# Altium PCB PCB1.PcbDoc
Units mil, origin at the board's own origin, x right, y up, seen from the top; angles counter-clockwise.
Board outline 716 x 1326 mil, 2 copper layers (Top Layer, Bottom Layer), stack 60.4 mil thick; 21 components, 34 nets, 131 pads, 41 vias.
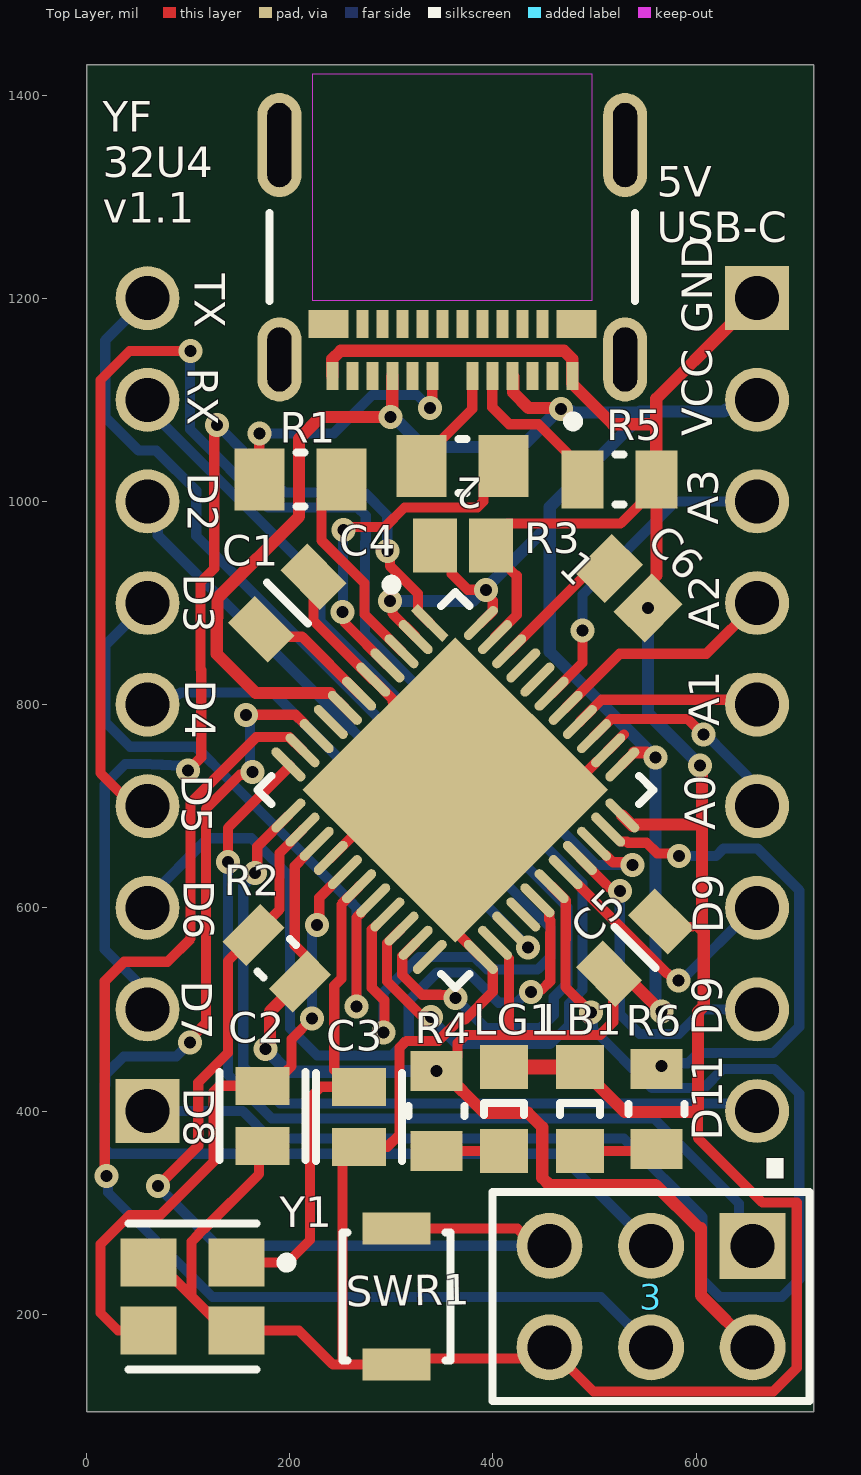
[diagram p0: Top Layer view]
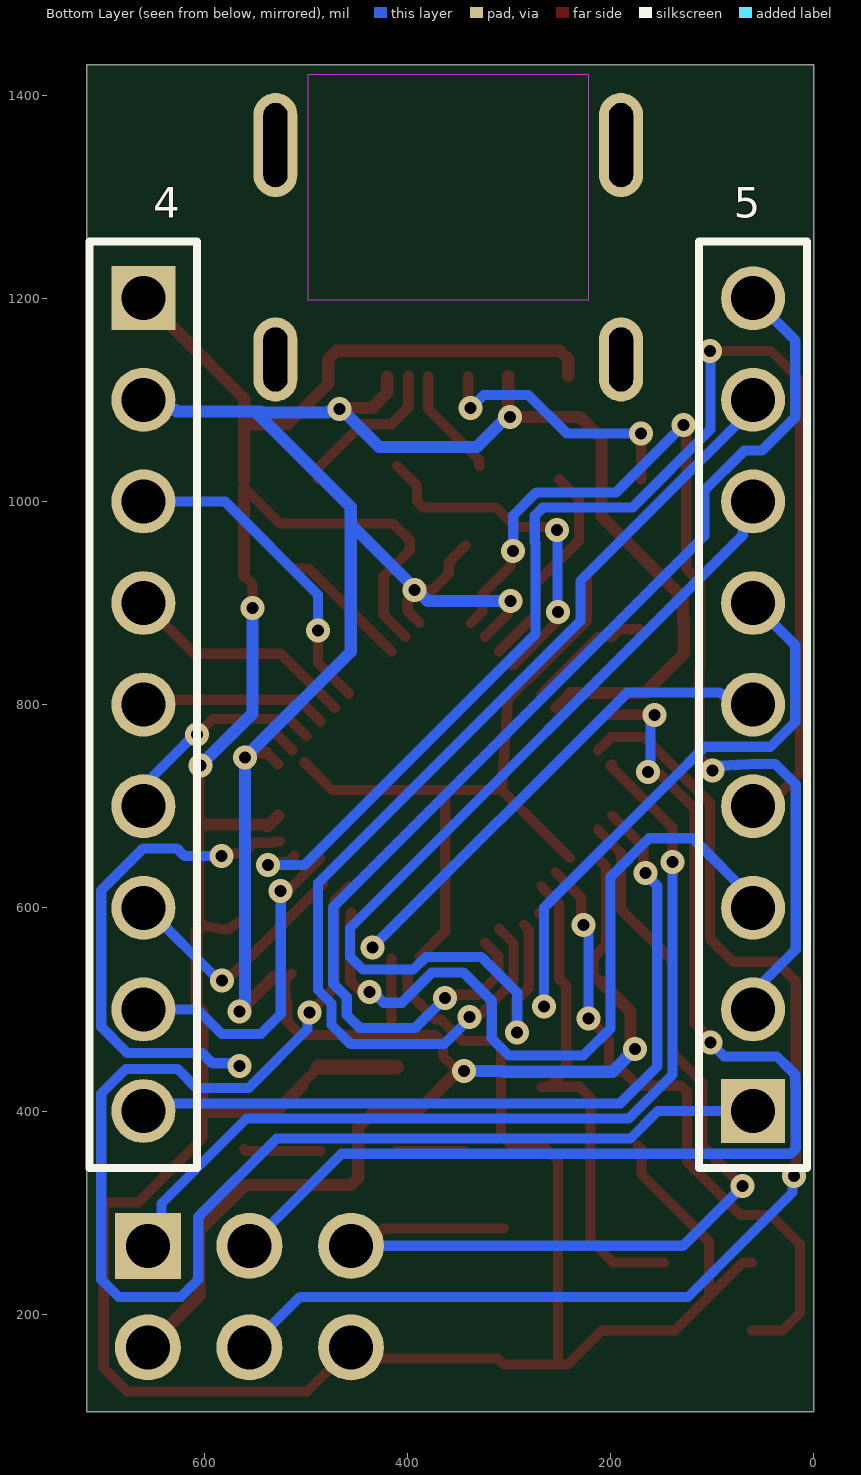
[diagram p1: Bottom Layer view, seen from below]
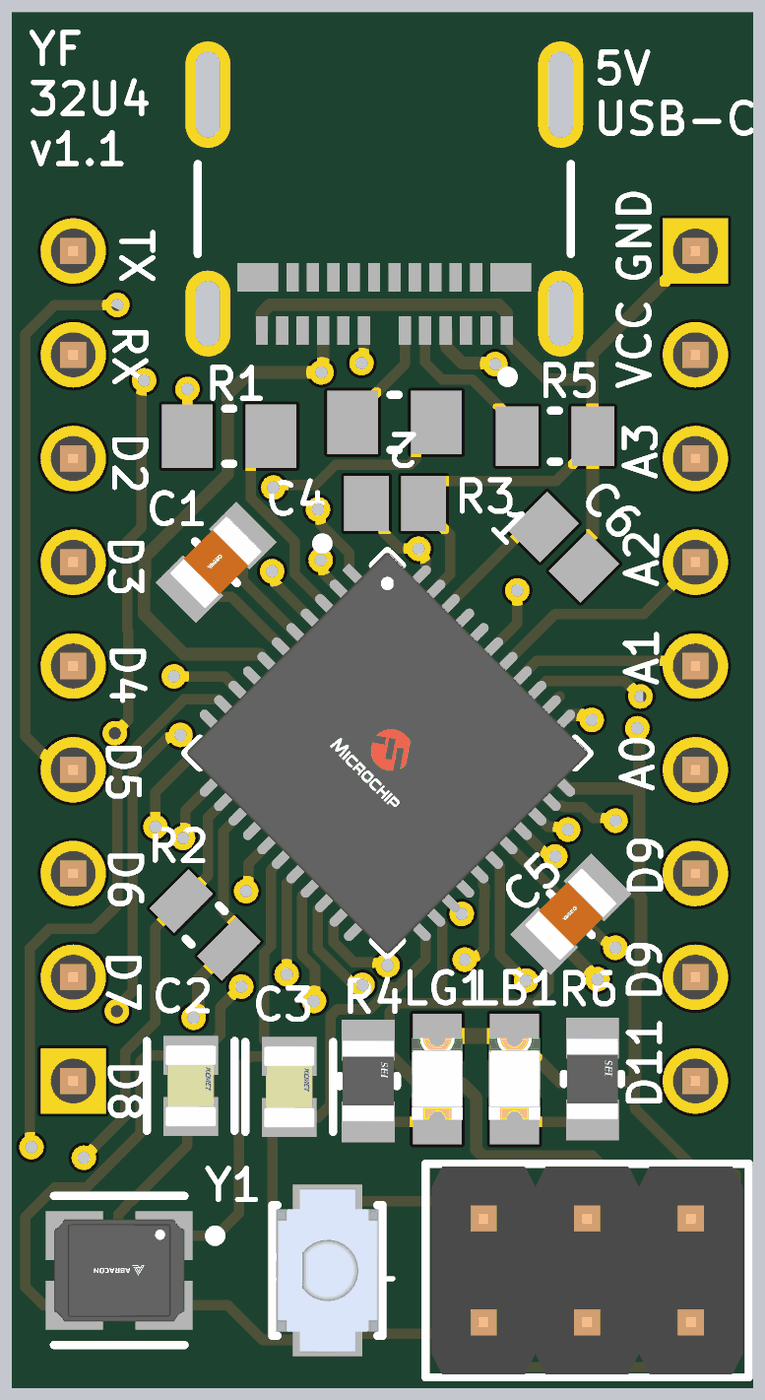
[diagram p2: 3D render of the assembled board from above, using the file's embedded part models]

## Layer stack, top to bottom
Top Solder: solder mask 0.5, Solder Resist, Dk 3.3
Top Layer: signal copper 0.7
Dielectric1: core 59, FR-4, Dk 4.3
Bottom Layer: signal copper 0.7
Bottom Solder: solder mask 0.5, Solder Resist, Dk 3.3

## Board outline
0,104 716,104 716,1430 0,1430

## Design rules (kind name [scope] priority, off if disabled: settings)
BoardOutlineClearance [All] p1: gap=7.87 ignorepadtopadclearanceinfootprint=FALSE
Clearance [All] p1: gap=5 ignorepadtopadclearanceinfootprint=FALSE
ComponentClearance [All] p1: gap=5 collisioncheckmode=3 verticalgap=5 showdistances=TRUE donotcheckwithout3dbody=TRUE
DiffPairsRouting [All] p1: maxlimit=10 minlimit=5 mostfreqgap=5 toplayer_minwidth=5 toplayer_maxwidth=1000 toplayer_prefwidth=5 bottomlayer_minwidth=5 bottomlayer_maxwidth=1000 bottomlayer_prefwidth=5 maxuncoupledlength=500
Height [All] p1: minheight=0 maxheight=71497.94 prefheight=500
HoleSize [All] p1: absolutevalues=TRUE maxlimit=248.03 minlimit=11.81 maxpercent=80.000 minpercent=20.000
HoleToHoleClearance [All] p1: gap=9.84 allowstackedmicrovias=FALSE
MinimumAnnularRing [All] p1: minimumring=3
MinimumSolderMaskSliver [All] p1: minsoldermaskwidth=0
PlaneClearance [All] p1: clearance=5
PlaneConnect PlaneConnectPowerPads [InPadClass('PowerPads')] p1: planeconnectstyle=Direct reliefexpansion=20 reliefentries=4 reliefconductorwidth=10 reliefairgap=10
PlaneConnect [All] p2: pad.planeconnectstyle=Relief pad.reliefexpansion=11.81 pad.reliefentries=4 pad.reliefconductorwidth=5 pad.reliefairgap=5 via.planeconnectstyle=Direct via.reliefexpansion=11.81 via.reliefentries=4 via.reliefconductorwidth=5 via.reliefairgap=5
PolygonConnect PolygonConnectPowerPads [All vs (InPadClass('PowerPads'))] p1: connectstyle=Direct reliefconductorwidth=10 reliefentries=4 polygonreliefangle="90 Angle" airgapwidth=10
PolygonConnect [All] p2: thpad.connectstyle=Relief thpad.reliefconductorwidth=5 thpad.reliefentries=4 thpad.polygonreliefangle="90 Angle" thpad.airgapwidth=5 smdpad.connectstyle=Relief smdpad.reliefconductorwidth=5 smdpad.reliefentries=4 smdpad.polygonreliefangle="90 Angle" smdpad.airgapwidth=5 via.connectstyle=Direct via.reliefconductorwidth=5 via.reliefentries=4 via.polygonreliefangle="90 Angle" via.airgapwidth=5
RoutingVias [All] p1: holewidth=11.81 width=23.62 viastyle="Through Hole" minholewidth=11.81 minwidth=23.62 maxholewidth=23.62 maxwidth=259.84
SilkToSilkClearance [All] p1: silktosilkclearance=0
SilkToSolderMaskClearance [IsPad] p1: minsilkscreentomaskgap=5 clearancetoexposedcopper=TRUE
SolderMaskExpansion [All] p1: expansion=2.95 istentingtop=FALSE
Width [All] p1: maxlimit=1000 minlimit=5 preferedwidth=10 minimp=50.000000 maximp=50.000000 favimp=50.000000
20 further rules are at their usual default settings.

## Classes and differential pairs
component class Sheet1: C1 C2 C4 C5 C6 LB1 LG1 R2 R3 R4 R6 SWR1 Y1

## Components (designator, comment, footprint, x,y, rotation, side; value= is the part's Value field where it differs from the comment)
1 "ATMEGA32U4RC-MUR" FP-44PW-IPC_A 363,716 r315 top (schematic designator 32U4)
2 "1054500101" FP-1054500101-MFG 360,1272 r180 top (schematic designator USB-C?)
3 "61300621121" 61300621121 555.67,217.38 r180 top (schematic designator ICSP)
4 "61300911121" 61300911121 660,800 r270 bottom (schematic designator PR)
5 "61300911121" 61300911121 60,800 r90 bottom (schematic designator PL)
C1 "1uF" FP-CC0805-EB-MFG 197.65,900 r45 top (schematic designator C2)
C2 "18pF" FP-C0805C-DN-MFG 173.29,395.28 r270 top value="18 pF" (schematic designator C5)
C3 "18pF" FP-C0805C-DN-MFG 268.26,394.31 r270 top value="18 pF" (schematic designator C4)
C4 ".1uF" CAPC2013X145X50LL20T25 370.35,956.75 r0 top (schematic designator C1)
C5 "1uF" FP-CC0805-EB-MFG 539.92,560.8 r45 top (schematic designator C0)
C6 ".1uF" CAPC2013X145X50LL20T25 533.19,914.61 r315 top (schematic designator C3)
LB1 "GREEN" 0805_A 485.58,401.98 r270 top (schematic designator LDG)
LG1 "GREEN" 0805_A 411.14,401.98 r270 top (schematic designator LDG)
R1 "22Ohm" RESC2013X60X30ML20T20 210.41,1021.53 r0 top (schematic designator R2)
R2 "10K" RESC2013X60X30LL20T20 187.21,550.36 r135 top (schematic designator R3)
R3 "22Ohm" RESC2013X60X30ML20T20 369.84,1034.86 r0 top (schematic designator R1)
R4 "1K" FP-RNCP0805-MFG 344.58,400 r270 top
R5 "5.1k" RESC2013X60X30NL20T20 524.61,1021.53 r0 top (schematic designator R0)
R6 "1K" FP-RNCP0805-MFG 560.75,401.98 r270 top (schematic designator R5)
SWR1 "" FP-B3U-1000P-MFG 305.11,217.38 r90 top (schematic designator SWR)
Y1 "ABM8G-16.000MHZ-18-D2Y-T" FP-ABM8G-MFG 104.31,217.38 r180 top (schematic designator Y?)

## Footprints (in the part's own frame and the unit in brackets; to place one, negate y for a bottom-side part, rotate by r counter-clockwise, add the part's x,y. Pads: shape width x height; smd on the part's side, far side on the other; paste and mask are expansions set on the pad)
0805_A [mm] "Chip LED, 2-Leads, Body 2.0x1.3mm, IPC Medium Density"
  rect 1.1x1.2 smd: 1(-1.05,0) 2(1.05,0)
  silkscreen extent -0.15,-0.5 0.15,0.5, body extent -1,-0.62 1,0.63, height 0.68
61300621121 [mm] "Pin Header, pitch 2.54 mm, THT, Vertical, dual row, 6p"
  rect 1.65x1.65 hole 1.1: 1(-2.54,-1.27)
  round 1.65 hole 1.1: 2(-2.54,1.27) 3(0,-1.27) 4(0,1.27) 5(2.54,-1.27) 6(2.54,1.27)
  silkscreen extent -3.96,-2.62 3.96,2.61, body extent -3.81,-2.54 3.81,2.54, height 8.59
61300911121 [mm] "Pin Header, pitch 2.54 mm, THT, Vertical, single row, 9p"
  rect 1.6x1.6 hole 1.1: 1(-10.16,0)
  round 1.6 hole 1.1: 2(-7.62,0) 3(-5.08,0) 4(-2.54,0) 5(0,0) 6(2.54,0) 7(5.08,0) 8(7.62,0) 9(10.16,0)
  silkscreen extent -11.58,-1.34 11.58,1.35, body extent -11.43,-1.27 11.43,1.27, height 8.57
CAPC2013X145X50LL20T25 [mm] "Chip Capacitor, 2-Leads, Body 2.00x1.25mm, IPC High Density"
  rect 1.1x1.35 smd: 1(-0.7,0) 2(0.7,0)
  body extent -1.1,-0.72 1.1,0.73, height 1.45
FP-44PW-IPC_A [mm]
  rect 1.106x0.239 smd paste+0 mask+0: 1(-3.403,2.5)
  rrect100% 1.106x0.239 smd paste+0 mask+0: 2(-3.403,2) 3(-3.403,1.5) 4(-3.403,1) 5(-3.403,0.5) 6(-3.403,0) 7(-3.403,-0.5) 8(-3.403,-1) 9(-3.403,-1.5) 10(-3.403,-2) 11(-3.403,-2.5) 23(3.403,-2.5) 24(3.403,-2) 25(3.403,-1.5) 26(3.403,-1) 27(3.403,-0.5) 28(3.403,0) 29(3.403,0.5) 30(3.403,1) 31(3.403,1.5) 32(3.403,2) 33(3.403,2.5)
  rrect100% 0.239x1.106 smd paste+0 mask+0: 12(-2.5,-3.403) 13(-2,-3.403) 14(-1.5,-3.403) 15(-1,-3.403) 16(-0.5,-3.403) 17(0,-3.403) 18(0.5,-3.403) 19(1,-3.403) 20(1.5,-3.403) 21(2,-3.403) 22(2.5,-3.403) 34(2.5,3.403) 35(2,3.403) 36(1.5,3.403) 37(1,3.403) 38(0.5,3.403) 39(0,3.403) 40(-0.5,3.403) 41(-1,3.403) 42(-1.5,3.403) 43(-2,3.403) 44(-2.5,3.403)
  rect 5.4x5.4 smd paste-1000 mask+0: 45(0,0)
  silkscreen extent -4.88,-3.5 3.5,3.5, body extent -4.46,-4.46 4.46,4.46, height 0.25
FP-1054500101-MFG [mm]
  rrect100% 1.1x2.1 hole 1.6 slot 0.6 at 0 deg paste-1000 mask+0: 1(-4.32,3.36) 2(4.32,3.36)
  rrect100% 1.1x2.6 hole 2.1 slot 0.6 at 0 deg paste-1000 mask+0: 3(-4.32,-2) 4(4.32,-2)
  rect 0.3x0.7 smd paste+0 mask+0: A1(-3,3.77) A2(-2.5,3.77) A3(-2,3.77) A4(-1.5,3.77) A5(-1,3.77) A6(-0.5,3.77) A7(0.5,3.77) A8(1,3.77) A9(1.5,3.77) A10(2,3.77) A11(2.5,3.77) A12(3,3.77) B2(2.25,2.47) B3(1.75,2.47) B4(1.25,2.47) B5(0.75,2.47) B6(0.25,2.47) B7(-0.25,2.47) B8(-0.75,2.47) B9(-1.25,2.47) B10(-1.75,2.47) B11(-2.25,2.47)
  rect 1x0.7 smd paste+0 mask+0: B1(3.1,2.47) B12(-3.1,2.47)
  Keep-Out Layer region: -3.5,-3.77 3.5,-3.77 3.5,1.88 -3.5,1.88
  silkscreen extent -4.57,-0.3 4.57,5.03
FP-ABM8G-MFG [mm]
  rect 1.4x1.2 smd paste+0 mask+0: 1(-1.1,-0.85) 2(1.1,-0.85) 3(1.1,0.85) 4(-1.1,0.85)
  silkscreen extent -2.48,-1.83 1.6,1.82, body extent -1.9,-1.55 1.9,1.55, height 0.25
FP-B3U-1000P-MFG [mm]
  rect 0.8x1.7 smd paste+0 mask+0: 1(-1.7,0) 2(1.7,0)
  silkscreen extent -1.6,-1.35 1.6,1.35, body extent -2.2,-1.45 2.2,1.45, height 0.25
FP-C0805C-DN-MFG [mm]
  rect 0.95x1.35 smd paste+0 mask+0: 1(-0.75,0) 2(0.75,0)
  silkscreen extent -1.1,-1.07 1.1,1.07, body extent -1.4,-0.85 1.4,0.85, height 0.25
FP-CC0805-EB-MFG [mm]
  rect 0.95x1.4 smd paste+0 mask+0: 1(-0.925,0) 2(0.925,0)
  silkscreen extent 0,-0.72 0,0.72, body extent -1.72,-1.17 1.72,1.17, height 0.25
FP-RNCP0805-MFG [mm]
  rect 1x1.3 smd paste+0 mask+0: 1(-1,0) 2(1,0)
  silkscreen extent -0.13,-0.7 0.12,0.7, body extent -1.6,-0.8 1.6,0.8, height 0.25
RESC2013X60X30LL20T20 [mm] "Chip Resistor, 2-Leads, Body 2.00x1.25mm, IPC High Density"
  rect 0.85x1.35 smd: 1(-0.825,0) 2(0.825,0)
  silkscreen extent -0.1,-0.58 0.1,0.57, body extent -1.1,-0.73 1.1,0.73, height 0.6
RESC2013X60X30ML20T20 [mm] "Chip Resistor, 2-Leads, Body 2.00x1.25mm, IPC Low Density"
  rect 1.25x1.55 smd: 1(-1.025,0) 2(1.025,0)
  silkscreen extent -0.1,-0.68 0.1,0.68, body extent -1.1,-0.72 1.1,0.72, height 0.6
RESC2013X60X30NL20T20 [mm] "Chip Resistor, 2-Leads, Body 2.00x1.25mm, IPC Medium Density"
  rect 1.05x1.45 smd: 1(-0.925,0) 2(0.925,0)
  silkscreen extent -0.1,-0.62 0.1,0.63, body extent -1.1,-0.72 1.1,0.72, height 0.6

## Part data
1: library part CMP-06276-000241-1, "IC MCU 8BIT 32KB FLASH 44VQFN", Case/Package=VQFN, Frequency=16MHz, Max Operating Temperature=85°C, Min Operating Temperature=-40°C, Core Architecture=AVR, Interface=I2C, Memory Size=32KB, Memory Type=FLASH, Number of I/Os=26, Oscillator Type=Internal, Packaging="Tape and Reel", Peripherals="Brown-out Detect/Reset", RoHS Compliant=Yes
2: library part CMP-04767-000004-1, "CONN RCP USB3.1 TYPEC 24P SMD RA", Current Rating=0.25/1.25/5A, Manufacturer=Molex, Package=0, Temperature="-30°C to +85°C", Temperature Range High=+85°C, Temperature Range Low=-30°C, Voltage Rating=30V, Automotive=No, Category=Conn, ComponentLink2Description=Datasheet, ComponentLink2URL=https://www.molex.com/webdocs/datasheets/pdf/en-us/1054500101_IO_CONNECTORS.pdf, Conn Orientation="Right Angle", Contact Material=Gold,Nickel, Device Class L1=Connectors, Device Class L2="USB Connectors", Device Class L3=unset, Digikey Description="CONN RCP USB3.1 TYPEC 24P SMD RA", Footprint Url=https://www.molex.com/pdm_docs/sd/1054500101_sd.pdf, Height=3.44mm, Is Female=yes, Lead Free=Yes, Manufacturer Part Number=1054500101, Mouser Description="USB Shielded I/O Receptacle; Type C; Right Angle; Surface Mount; Gold over Nickel", Number Of Contacts=24, Octopart=https://octopart.com/105450-0101-molex-68082325, Pitch=0.5mm, RoHS=TRUE, Shielding=true, Usb Standard="USB 3.1"
3: library part CMP-1502-01072-1, "THT Vertical Pin Header WR-PHD, Pitch 2.54 mm, Dual Row, 6 pins", Contact Resistance=20mOhm, Manufacturer="Wurth Elektronik", Operating Temperature=-40to105degC, Rated Current=3A, Withstanding Voltage=500VAC, Working Voltage=250VAC, Datasheet URL=https://katalog.we-online.de/em/datasheet/6130xx21121.pdf, Gender=Male, Manufacturer URL=http://www.we-online.de, Mounting Technology=THT, Orientation=Vertical, Package Reference=61300621121, Packaging=Bag, Part Number=61300621121, Pin Number=6, Pitch=2.54mm, Publisher=WurthElektronik, Row Number=Dual
4 5: library part CMP-1502-01080-1, "THT Vertical Pin Header WR-PHD, Pitch 2.54 mm, Single Row, 9 pins", Contact Resistance=20mOhm, Manufacturer="Wurth Elektronik", Operating Temperature=-40to105degC, Rated Current=3A, Withstanding Voltage=500VAC, Working Voltage=250VAC, Datasheet URL=https://katalog.we-online.de/em/datasheet/6130xx11121.pdf, Gender=Male, Manufacturer URL=http://www.we-online.de, Mounting Technology=THT, Orientation=Vertical, Package Reference=61300911121, Packaging=Bag, Part Number=61300911121, Pin Number=9, Pitch=2.54mm, Publisher=WurthElektronik, Row Number=Single
C1 C5: library part CMP-03422-000665-2, "CAP CER 1UF 6.3V X7R 0805 - CC0805KKX7R5BB105", Case Code (Imperial)=0805, Case Code (Metric)=2012, Dielectric=X7R, Max Operating Temperature=125°C, Min Operating Temperature=-55°C, Resistor Type=Ceramic, Tolerance=10%, Voltage Rating=6.3V, Capacitance=1uF, Case/Package=0805, Construction=Flat, Depth=1.25mm, Halogen Free="Halogen Free", Height=1.25mm, Lead Free="Lead Free", Length=2mm, Mount="Surface Mount", Packaging="Tape and Reel", Radiation Hardening=No, RoHS Compliant=Yes, Series=CC, Termination=SMD/SMT, Thickness=0.057inch, Voltage Rating (DC)=6.3V, Weight=0.000194oz, Width=0.049inch
C2 C3: library part CMP-1036-01146-3, "CAP CER 18PF 50V 10% NP0 0805 - C0805C180K5GACTU", Capacitance="18 pF", Manufacturer=KEMET, Manufacturer Part Number=C0805C180K5GACTU, Package=C0805C-DN, Temperature="-55°C to +125°C", Temperature Characteristic=C0G, Temperature Coefficient=30ppm/°C, Temperature Range High=+125°C, Temperature Range Low=-55°C, Tolerance=0.1, Voltage Rating="50 V", Automotive=No, Category=Cap, ComponentLink2Description=Datasheet, ComponentLink2URL=https://content.kemet.com/datasheets/KEM_C1003_C0G_SMD.pdf, Device Class L1="Passive Components", Device Class L2=Capacitors, Device Class L3="Ceramic Capacitors", Digikey Description="CAP CER 18PF 50V 10% NP0 0805", Height=0.88mm, Ipc Land Pattern Name=CAPC200125X78, Lead Free=Yes, Material=Ceramic, Mouser Description="Multilayer Ceramic Capacitors MLCC - SMD/SMT 50volts 18pF C0G 10%", Octopart=https://octopart.com/c0805c180k5gactu-kemet-6728804, RoHS=TRUE
C4 C6: library part CMP-1036-04391-2, "C0805C104K9RACTU", Manufacturer=Kemet, Part Number=C0805C104K9RACTU
LB1 LG1: library part CMP-1426-00007-1, "SMD mono-color Chip LED, WL-SMCW, Green - 150080GS75000", Color=Green, Manufacturer="Wuerth Elektronik", PartNumber=150080GS75000, ComponentLink1Description="Manufacturer URL", ComponentLink1URL=http://www.we-online.com, ComponentLink2Description=Datasheet, ComponentLink2URL=http://katalog.we-online.com/led/datasheet/150080GS75000.pdf, PackageReference=0805_A
R1 R3: library part CMP-2001-04578-1, "RK73B2ATTD220J", Manufacturer="KOA Speer", Part Number=RK73B2ATTD220J
R2: library part CMP-2001-01993-1, "RK73H2ATTD1002F", Manufacturer="KOA Speer", Part Number=RK73H2ATTD1002F
R4 R6: library part CMP-26527-001902-1, "1kΩ ±1% 0.25W 0805 High Power Anti-Sulfur Thin Film Chip Resistor - RNCP0805FTD1K00", Case Code (Imperial)=0805, Case Code (Metric)=2012, Max Operating Temperature=155°C, Max Power Dissipation=250mW, Min Operating Temperature=-55°C, Resistance=1kR, Resistor Type="Thin Film", Temperature Coefficient=100ppm/°C, Tolerance=1%, Case/Package=0805, Features="Moisture Resistant", Height=0.024inch, Lead Free="Lead Free", Length=0.079inch, Mount="Surface Mount", Number of Terminations=2, Packaging="Tape and Reel", Power Rating=250mW, RoHS Compliant=Yes, Series=RNCP, Size Code=0805, Width=0.049inch
R5: library part CMP-2001-01842-1, "RK73B2ATTD512J", Manufacturer="KOA Speer", Part Number=RK73B2ATTD512J
SWR1: library part CMP-2100-03586-2, "SWITCH TACTILE SPST-NO 0.05A 12V - B3U-1000P", Contact Current Rating=50mA, Contact Resistance=100mR, Insulation Resistance=100MR, Max Operating Temperature=70°C, Max Voltage Rating (DC)=12V, Min Operating Temperature=-25°C, Operating Force=1.5N, Package Quantity=1, Ratings="Dust Proof", Actuator Length=0.4mm, Actuator Type=Standard, Contact Material=Silver, Current Rating=50mA, Depth=2.5mm, Electrical Life=200000Cycles, Height=1.2mm, Illumination Type=Non-Illuminated, Lead Free="Lead Free", Length=4mm, Max Current Rating=50mA, Mechanical Life=200000Cycles, Mount="Surface Mount", Orientation=Straight, Packaging="Tape and Reel", Switch Function=Off-Mom, Switch Travel=0.15mm, Termination=SMD/SMT, Throw Configuration=SPST, Voltage Rating (DC)=12V, Weight=0.000776oz, Width=3mm
Y1: library part CMP-27762-006537-2, "Crystal 16MHz ±20ppm (Tol) ±30ppm (Stability) 18pF FUND 80Ω 4-Pin SMD T/R", Case/Package=CSMD, ESR (Equivalent Series Resistance)=80R, Frequency=16MHz, Frequency Stability=30ppm, Frequency Tolerance=20ppm, Load Capacitance=18pF, Max Operating Temperature=85°C, Min Operating Temperature=-40°C, Operating Frequency="16 MHz", Package Quantity=1000, Depth=2.5mm, Height=1mm, Lead Free="Lead Free", Length=3.2mm, Mount="Surface Mount", Number of Pins=4, Packaging="Tape and Reel", Radiation Hardening=No, Series=ABM8G, Series Resistance=80R, Termination=SMD/SMT, Tolerance=20ppm, Width=2.5mm

## Via types
v1: diameter 23.62, hole 11.81, Top Layer to Bottom Layer, 41 vias

## Nets (pads, with @x,y where several pads share a name; then routed paths per layer and width w, separated by ;. In a path a pad name is that pad's centre, name@x,y a point inside that pad or via, vN(x,y) a via of type N, cw(c..) or ccw(c..) an arc to the next point about the centre after c; other vN are vias at no path point)
A0: 1.36 4.6 | length 214.6
  Top Layer w10: 1.36 516.21,785.69 592.05,785.69 v1(607.05,770.69)
  Bottom Layer w10: v1(607.05,770.69) 609.32,770.69 630.68,749.33 649.86,730.15 649.86,710.14 4.6
A1: 1.37 4.5 | length 185.9
  Top Layer w10: 1.37 485.58,783.31 497.64,795.37 497.64,795.65 506.8,804.81 655.19,804.81 4.5
A2: 1.38 4.4 | length 231.1
  Top Layer w10: 1.38 524.84,850 610,850 4.4
A3: 1.39 4.3 | length 319.9
  Top Layer w10: 1.39 488.19,841.19 v1(488.19,872.85)
  Bottom Layer w10: v1(488.19,872.85) 488.19,908.19 580,1000 4.3
AREF: 1.42 C6.1 | length 131.5
  Top Layer w10: 1.42 497.57,934.09 C6.1
D2: 1.19 5.7 | length 954.3
  Top Layer w10: 1.19@285.43,583 280.8,578.37 280.8,521.37 293.19,508.98 293.19,478.23 v1(292.13,477.17)
  Bottom Layer w10: 5.7 70.14,989.86 70.14,966.54 456.6,580.08 456.6,551.8 444,539.2 394.3,539.2 382.06,551.44 327.09,551.44 292.13,516.48 v1(292.13,477.17)
D3: 1.18 5.6 | length 649
  Top Layer w10: v1(265.8,502.86) 265.8,590.55 1.18@270.53,595.28
  Bottom Layer w10: 5.6 18.5,858.5 18.5,782.81 41.31,760 42.81,758.5 107.65,758.5 141.76,724.39 259.98,605.83 265.8,600.01 v1(265.8,502.86)
D4: 1.25 5.5 | length 483.4
  Bottom Layer w10: 5.5 70.14,810.14 90.68,810.14 92.36,811.81 183.88,811.81 v1(434.65,561.01)
D5: 1.31 5.4 | length 1336
  Top Layer w10: 5.4 46.28,700 13.68,732.59 13.68,1119.45 42.23,1148 v1(102.44,1148) ; 1.31@511.56,651.37 518.05,644.88 534.58,644.88 v1(537.19,642.27)
  Bottom Layer w10: v1(102.44,1148) 102,1147.56 102,1070.79 178.92,993.87 267.05,993.87 274.78,986.14 274.78,960.62 274.19,960.03 274.19,869.37 501.28,642.27 v1(537.19,642.27)
D6: 1.27 5.3 | length 751.1
  Top Layer w10: v1(437.58,517) 440.18,519.61 448.32,519.61 456.46,527.75 456.46,575.05 456.67,575.27 456.67,587.45 455.47,588.65 1.27@455.47,595.28
  Bottom Layer w10: 5.3 60,609.04 119.42,668.46 162.44,668.46 200.19,630.71 200.19,481.42 227.01,454.59 300.4,454.59 317.14,471.33 317.14,508.45 345.13,536.44 375.85,536.44 405.77,506.52 423.42,506.52 433.89,517 v1(437.58,517)
D7: 1.1 5.2 | length 1015.5
  Top Layer w10: v1(100.06,735.25) 112.95,748.15 112.95,833.88 112.19,834.65 112.19,920.38 125.76,933.96 125.76,1072.72 v1(128.34,1075.29) ; v1(296,951) 298.61,948.39 298.61,936.68 326.21,909.08 326.21,891.99 1.1
  Bottom Layer w10: 5.2 60,517 20.93,556.07 18,559 18,721.41 35.16,738.57 38.09,741.5 60,741.5 cw(c60,700) 65.04,741.19 74.15,740.74 92.38,739.85 100.26,739.46 101.5,739.4 101.5,736.69 v1(100.06,735.25) ; v1(128.34,1075.29) 160.28,1043.35 194.76,1008.87 273.26,1008.87 296,986.13 v1(296,951)
D8: 1.28 5.1 | length 1346.3
  Top Layer w10: 1.28 471.67,607.33 471.67,569.05 471.46,568.84 471.46,521.96 v1(496.64,496.78)
  Bottom Layer w10: 5.1 153.63,400 180.63,373 528.83,373 606,295.83 606,234.1 623.1,217 684.39,217 701.5,234.1 701.5,417.19 677.19,441.5 626.39,441.5 607.44,422.55 556.64,422.55 498.48,480.71 498.48,494.94 v1(496.64,496.78)
D9: 1.29 4.7 | length 245.4
  Top Layer w10: 1.29@483.52,623.32 571.64,535.2 572.38,535.2 579.12,528.45 v1(582.81,528.45)
  Bottom Layer w10: v1(582.81,528.45) 585.63,528.45 657.18,600 4.7
D10: 1.30 4.8 | length 327.2
  Top Layer w10: 1.30 515.63,619.05 522.26,619.05 v1(524.87,616.44)
  Bottom Layer w10: v1(524.87,616.44) 524.87,495.42 544.55,475.74 582.97,475.74 607.24,500 4.8
D11: 1.12 4.9 | length 789.3
  Top Layer w10: v1(165.82,634.23) 168,636.41 168,660.2 1.12
  Bottom Layer w10: v1(165.82,634.23) 165.82,633.13 154.25,621.56 154.25,443.84 190.54,407.55 652.45,407.55 4.9
D13: 1.32 R6.1 | length 488.3
  Top Layer w10: 1.32@525.48,665.29 531.7,665.29 532.9,664.09 551.19,664.09 561.71,653.56 580.39,653.56 v1(583,650.96)
  Bottom Layer w10: v1(565.67,444.36) 568.28,446.97 592.13,446.97 602.16,457 675.68,457 701.5,482.81 701.5,617.19 660.18,658.5 627.21,658.5 619.66,650.96 v1(583,650.96)
D+: 1.4 R3.2 | length 344.6
  Top Layer w10: v1(251.78,891.38) 254.38,888.77 254.38,880.29 1.4 ; v1(252.97,972.06) 255.57,974.66 293.64,974.66 312.98,994 384.74,994 390.59,999.86 390.59,1015.25 R3.2
  Bottom Layer w10: v1(251.78,891.38) 252.37,891.98 252.37,971.46 v1(252.97,972.06)
D-: 1.3 R1.2 | length 209.8
  Top Layer w10: R1.2 231.16,1001.93 231.16,961.83 273.59,919.4 273.59,888.93 1.3
GND: 1.5 1.15 1.23 1.33 1.35 1.43 1.45 2.A1 2.A12 3.6 4.1 C1.2 C2.2 C3.2 C4.2 C5.2 C6.2 LB1.1 LG1.1 R5.2 SWR1.1 Y1.2 Y1.4 | length 4324.5
  Top Layer w10: Y1.2 70,250.84 103.46,217.38 ; C2.2 169.83,362.29 169.83,337.91 116.39,284.46 115.91,284.46 110.06,278.61 110.06,278.13 103.46,271.54 103.46,217.38 ; C1.2 223.4,882.47 281.22,824.66 1.5 301,805.84 1.45@307.32,716 ; 1.15 1.45@307.32,716 ; 1.23 363,576.81 1.45 ; 1.23@399.8,539.6 399.8,517.24 372.53,489.97 367.12,489.97 346.2,469.05 314.85,469.05 308,462.21 308,376.78 296,364.78 C3.2 265.67,364.78 251.97,351.08 251.97,150.45 ; 1.43 402.06,866.82 423.42,888.18 423.42,927.02 422.72,927.02 397.91,951.83 C4.2 397.91,961.67 414.57,978.32 525.69,978.32 561.03,1013.66 R5.2 ; LB1.1@487.54,443.32 504.2,426.66 LB1.1@504.2,424.7 ; 1.35@501.55,743.2 474.35,716 1.45 ; 1.35 529.05,770.69 ; v1(552.68,895.12) 552.68,918.67 561.03,927.02 ; 560.8,1088.38 561.03,1088.61 ; C5.2 573.87,580.72 576.47,578.86 580.5,578.86 588.36,580.19 588.94,580.28 601.76,582.44 604,582.82 605.81,584.63 ; 601.76,399.15 601.76,373.45 665.21,310 699,310 699,147 676,124 499.05,124 3.6 440.8,167.38 429.77,156.35 311.02,156.35 SWR1.1 251.97,150.45 ; 602.49,682.01 605.81,678.69 ; v1(604,740) v1@605.81,738.19 ; 103.46,217.38 136.93,183.91 Y1.4 209,183.91 242.46,150.45 251.97,150.45 ; 1.45@307.32,716 1.45
  Top Layer w12: 2.A12 241.89,1140.11 250.14,1148.36 469.86,1148.36 478.11,1140.11 2.A1 478.11,1115.77 517.88,1076 560.8,1076 ; LB1.1@504.2,424.7 529.75,399.15 601.76,399.15 601.76,497.7 607.5,503.45 607.5,576.7 601.76,582.44 ; 1.33 537.57,680.62 539.4,680.62 540.78,682.01 602.49,682.01 ; R5.2@560.8,1021.76 560.8,1076 ; 561.03,927.02 R5.2@561.03,1013.66 ; 605.81,584.63 605.81,678.69 v1@605.81,738.19 ; 4.1@659.77,1200 659.77,1199.77 634.51,1174.5 634.28,1174.5 560.8,1101.03 560.8,1088.38 560.8,1076
  Top Layer w15: LG1.1 LB1.1 LB1.1@487.54,443.32
  Bottom Layer w12: v1(552.68,895.12) 552.68,791.32 v1(604,740)
MISO: 1.11 3.1 | length 933.8
  Top Layer w10: v1(139.25,644.88) 139.25,678.66 199.99,739.4 199.99,739.81 1.11
  Bottom Layer w10: v1(139.25,644.88) 139.25,435.59 182.29,392.55 558.59,392.55 642.14,309 642.14,280.9 3.1
MOSI: 1.10 3.4 | length 1184.8
  Top Layer w10: v1(19.68,336.22) 18,337.91 18,527.75 37.13,546.88 79.69,546.88 102.44,569.63 102.44,703.54 166.9,768 199.65,768 1.10
  Bottom Layer w10: v1(19.68,336.22) 21.19,334.72 21.19,319.81 124,217 506.05,217 3.4
NetLDB_2: LB1.2 R6.2 | length 76
  Top Layer w10: LB1.2 558.78,360.64 R6.2
NetLDG_2: LG1.2 R4.2 | length 66.6
  Top Layer w10: R4.2 377,360.63 LG1.2
NetR0_1: 2.A5 R5.1 | length 155.7
  Top Layer w10: 2.A5 399.37,1092.63 416,1076 444.81,1076 488.19,1032.61 R5.1
NetR1_1: 2.A6 R3.1 | length 109.5
  Top Layer w10: R3.1 329.49,1040.77 379.69,1090.96 2.A6
NetR2_1: 2.A7 R1.1 | length 266.9
  Top Layer w10: R1.1 v1(170.06,1067) ; v1(338,1092) 340.32,1094.32 2.A7
  Bottom Layer w10: v1(170.06,1067) 243.44,1067 281.25,1104.81 325.19,1104.81 v1(338,1092)
RESET: 1.13 3.5 R2.2 SWR1.2 | length 977.8
  Top Layer w10: v1(70.14,326) 110,365.86 110,428 139.25,457.25 139.25,547.81 164.24,572.8 R2.2 164.98,573.33 189.87,598.21 189.87,653.81 212.59,676.53 1.13 ; SWR1.2 423.87,284.31 440.8,267.38 3.5
  Bottom Layer w10: v1(70.14,326) 128.76,267.38 3.5
RX: 1.20 5.8 | length 1069.3
  Top Layer w10: 1.20 295.8,565.28 295.8,527.58 329.91,493.47 338.12,493.47 v1(338.95,492.65)
  Bottom Layer w10: 5.8 60,1091.57 229.97,921.61 229.97,882.35 488.11,624.2 488.11,519.09 474.83,505.82 474.83,484.73 455.9,465.81 364.17,465.81 338.95,491.02 v1(338.95,492.65)
SCK: 1.9 3.3 | length 1164.6
  Top Layer w10: v1(102,467.25) 102,470.93 117.44,486.38 117.44,697.33 134.29,714.18 151.13,731.02 160.76,731.02 v1(163.37,733.63) ; v1(157,790) 205.48,790 1.9@214.65,780.84
  Bottom Layer w10: 24.36,441.5 18.51,435.64 18.51,425.89 18,425.39 18,422.75 18,363 23,358 465.05,358 3.3 ; 24.39,441.5 36.48,453.59 88.34,453.59 v1(102,467.25) ; v1(157,790) 157,786.31 160.76,782.55 160.76,736.23 v1(163.37,733.63)
TX: 1.21 5.9 | length 1139.9
  Top Layer w10: 1.21 310.8,552.44 310.8,533.79 330.14,514.46 347.98,514.46 348.42,514.02 360.52,514.02 v1(363.13,511.41)
  Bottom Layer w10: 5.9 18.51,1158.5 18.51,1082.81 51.32,1050 68.69,1050 108,1010.69 108,965.94 473.11,600.83 473.11,525.31 459.83,512.03 459.83,494.57 447.05,481.79 392.46,481.79 363.13,511.12 v1(363.13,511.41)
UCAP: 1.6 C1.1 | length 122.7
  Top Layer w10: C1.1 191.27,874.25 198.7,866.82 212.18,866.82 1.6
VCC: 1.2 1.7 1.14 1.24 1.34 1.44 2.A4 2.A9 3.2 4.2 C4.1 C5.1 R2.1 R4.1 | length 3360.5
  Top Layer w10: v1(176.06,461) 176.06,464.69 v1@180.71,469.33 ; R2.1@210.03,527.39 R2.1 217.14,534.35 217.14,550.94 204.87,563.21 204.87,640.97 1.14@214.85,650.96 ; 1.7@239.72,811.44 1.7 ; v1(298.61,902.09) 301.21,899.49 301.21,889.55 323.94,866.82 1.2 ; C4.1 359.45,940.09 359.45,928.78 375.15,913.07 392.93,913.07 v1(393,913) 393,909.31 399.85,902.46 399.85,892.05 1.44 ; R4.1@350.49,439.37 365.17,454.05 365.17,466.81 373.33,474.97 415.77,474.97 ; 1.24@415.77,550 415.77,474.97 ; 2.A4 2.A4@419.96,1122.67 ; C5.1 C5.1@517.22,532 ; 1.34 1.34@539.05,752.85 ; C5.1@531.74,532 C5.1@517.22,532 ; v1@551.46,752.85 556.31,748 v1(560,748) ; 415.77,474.97 505.68,474.97 518.45,487.75 518.45,507.42 520.44,509.41 520.44,528.78 C5.1@517.22,532
  Top Layer w12: v1@180.71,469.33 180.71,498.07 R2.1@210.03,527.39 ; 1.7@239.72,811.44 166.56,811.44 128.19,849.81 128.19,885.07 128.95,885.84 128.95,904.95 209,985 209,1061.75 230.25,1083 v1(299.4,1083) 300.95,1084.54 2.A9 ; v1(344.58,439.37) 350.49,439.37 391.55,398.3 434.31,398.3 448.58,384.03 448.58,334.33 455.61,327.3 559.91,327.3 602.7,284.51 604.7,284.51 604.7,218.35 3.2 ; 2.A4@419.96,1122.67 419.96,1107.11 435.07,1092 466,1092 v1(467,1091) ; C5.1@531.74,532 v1(565.67,498.07) ; 1.34@539.05,752.85 v1@551.46,752.85
  Bottom Layer w10: v1(176.06,461) v1@176.23,461 ; 305.61,438.59 306.39,439.37 ; 456,976 456,977.61 456,978 ; v1@560,507.43 565.67,501.75 v1(565.67,498.07) ; 4.2@647,1087 660,1087 4.2
  Bottom Layer w12: v1@176.06,460.94 198.41,438.59 305.61,438.59 ; v1(298.61,902.09) 298.73,901.97 380.16,901.97 391.19,913 v1@392.51,913 ; v1(299.4,1083) 302.44,1083 331.83,1053.61 428,1053.61 465.39,1091 v1(467,1091) 469.22,1088.78 477.44,1088.78 478.84,1087.38 543.61,1087.38 544.83,1088.61 550,1088.61 ; 306.39,439.37 v1(344.58,439.37) ; v1(393,913) 393,914.61 456,977.61 ; 456,976 456,852 v1(560,748) v1@560,507.43 ; 456,978 456,994.61 550,1088.61 ; 4.2 650.24,1090.24 629.11,1090.24 627.47,1088.61 550,1088.61
XTAL1: 1.17 C3.1 Y1.1 | length 488.2
  Top Layer w10: Y1.1 197.84,250.84 220,273 220,413 230.84,423.84 C3.1@259.19,423.84 ; C3.1 C3.1@259.19,423.84 ; 1.17 268.26,620.85 250.8,603.39 250.8,530.21 243.85,523.26 243.85,440.38 259.19,425.04 C3.1@259.19,423.84
XTAL2: 1.16 C2.1 Y1.3 | length 635.9
  Top Layer w10: Y1.3 31,183.91 13.68,201.23 13.68,268.84 42.4,297.56 72.55,297.56 125,350.02 125,418.95 130.86,424.8 C2.1 186.99,438.5 195.98,438.5 201.84,444.36 201.84,470.84 v1(222,491) ; v1(226.68,583) 229,585.32 229,609.84 1.16
  Bottom Layer w10: v1(222,491) 222,574.64 226.68,579.31 v1(226.68,583)
pads on no net: 1.8 1.22 1.26 1.40 1.41 2.1 2.2 2.3 2.4 2.A2 2.A3 2.A8 2.A10 2.A11 2.B1 2.B2 2.B3 2.B4 2.B5 2.B6 2.B7 2.B8 2.B9 2.B10 2.B11 2.B12

## Silkscreen, mask and mechanical layers (free items; w line width, h text height)
Top Overlay:
  text "YF / 32U4 / v1.1" at 16,1274.03 h30
  text "5V / USB-C" at 561.19,1255.03 h30
  text "TX" at 106.5,1224 h30 r270
  text "GND" at 615.65,1165.65 h30 r90
  text "RX" at 99.73,1131.76 h30 r270
  text "VCC" at 615.65,1064.36 h30 r90
  text "D2" at 99.73,1028.36 h30 r270
  text "A3" at 621.65,977.06 h30 r90
  text "D3" at 95.7,928.72 h30 r270
  text "A2" at 622.65,873.43 h30 r90
  text "D4" at 97.36,824.5 h30 r270
  text "A1" at 622.65,778.49 h30 r90
  text "D5" at 93.49,730.79 h30 r270
  text "A0" at 618.65,676.43 h30 r90
  text "D6" at 95.59,627.17 h30 r270
  text "D9" at 626.65,574.82 h30 r90
  text "D7" at 93.49,528.45 h30 r270
  text "D9" at 625.65,474.28 h30 r90
  text "D8" at 95.7,423 h30 r270
  text "D11" at 625.65,370.57 h30 r90
  text "." at 652,333.21 h120